# Altium PCB LM2596MOD.PcbDoc
Units mm, origin at the board's own origin, x right, y up, seen from the top; angles counter-clockwise.
Board outline 45.85 x 27.3 mm, 2 copper layers (Top Layer, Bottom Layer); 10 components, 5 nets, 45 pads, 141 vias.
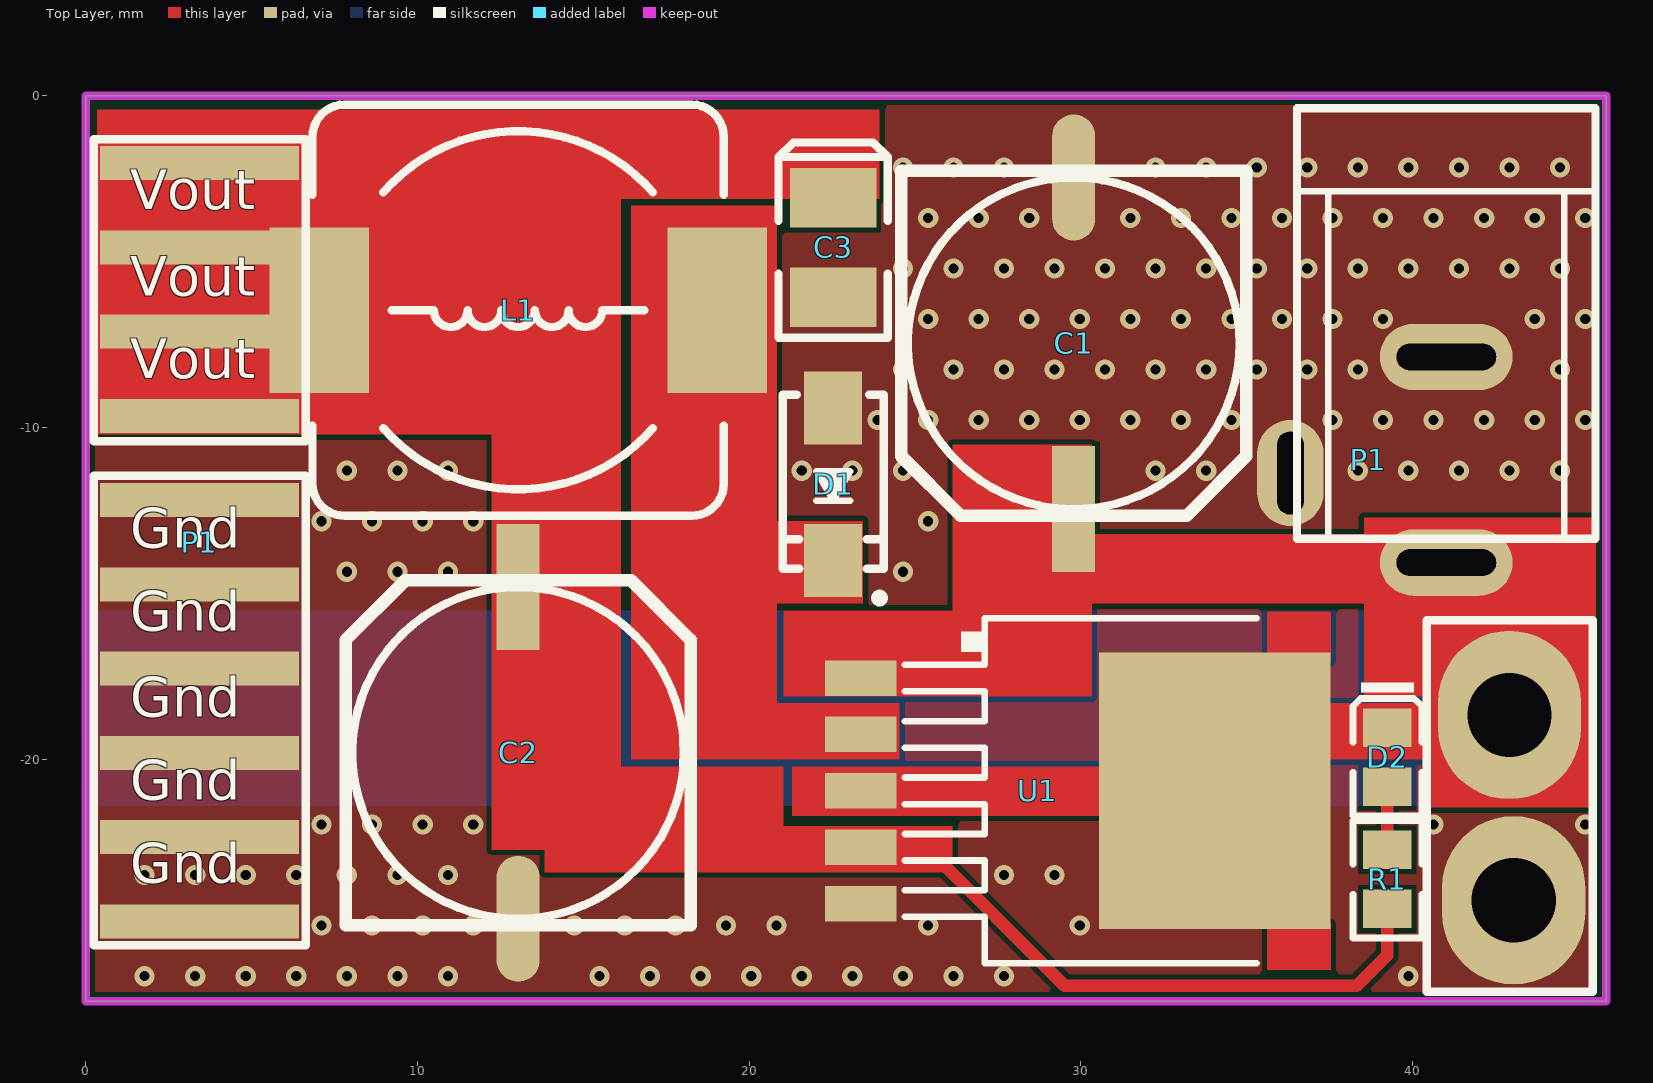
[diagram p0: Top Layer view]
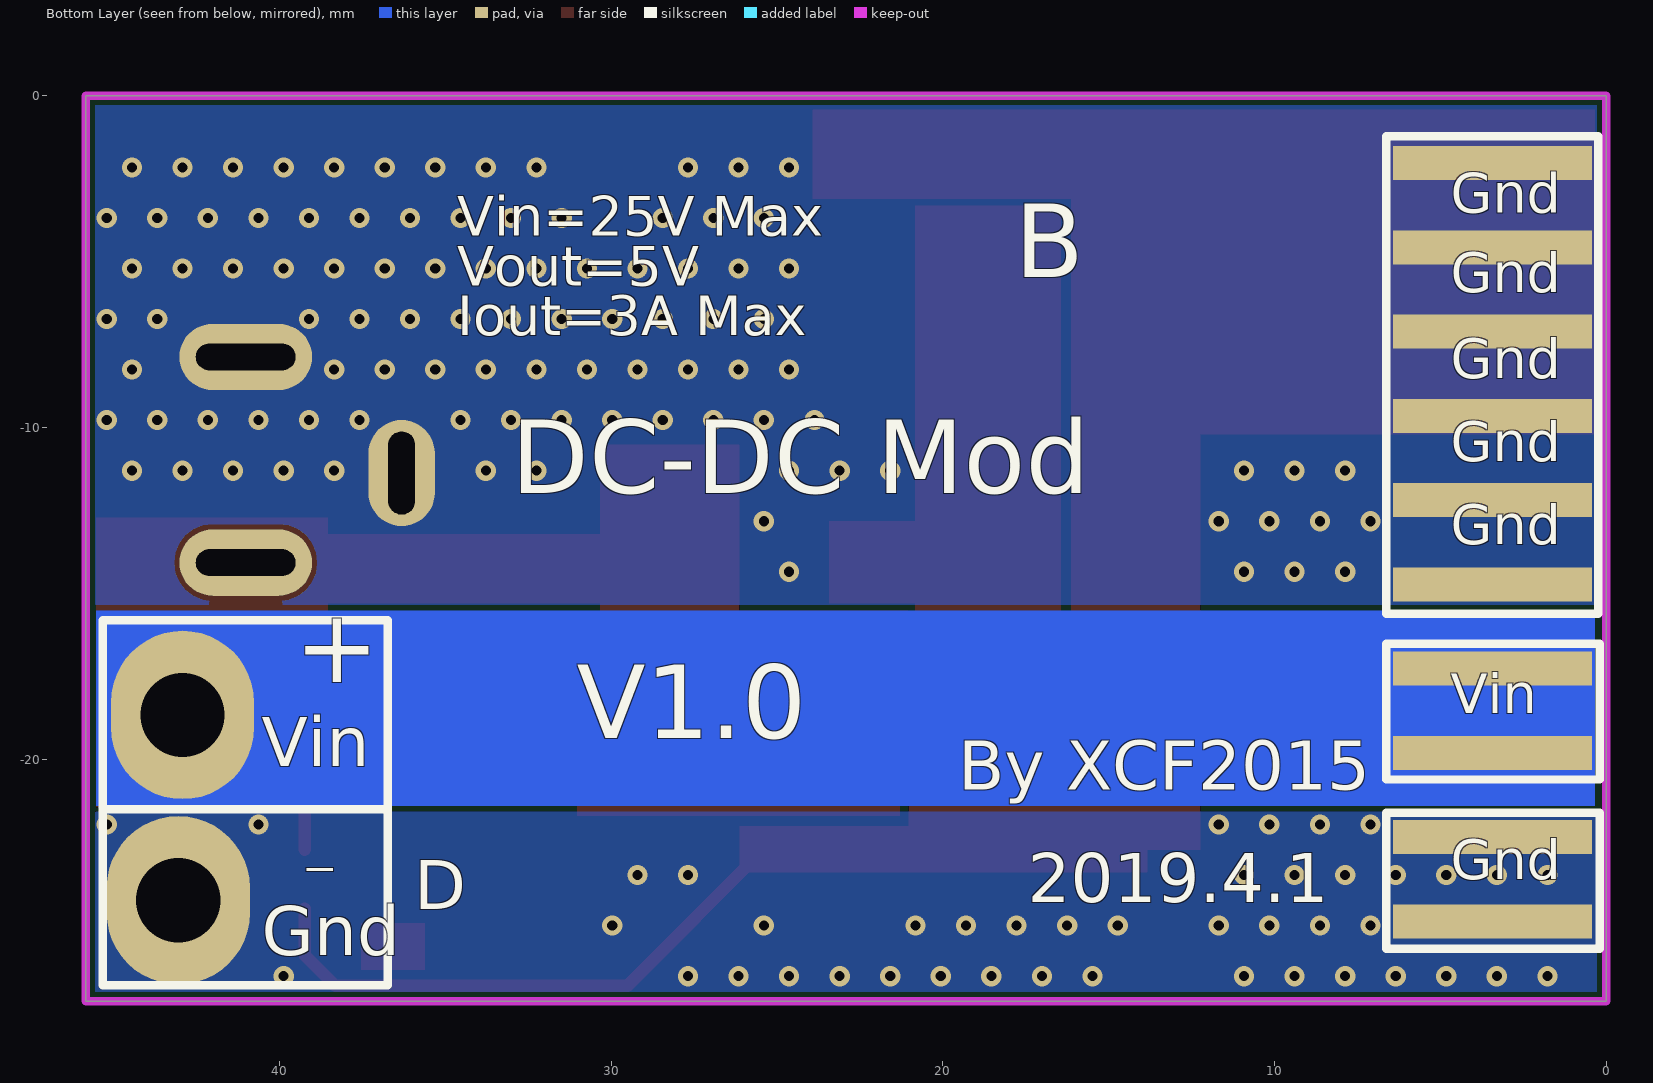
[diagram p1: Bottom Layer view, seen from below]
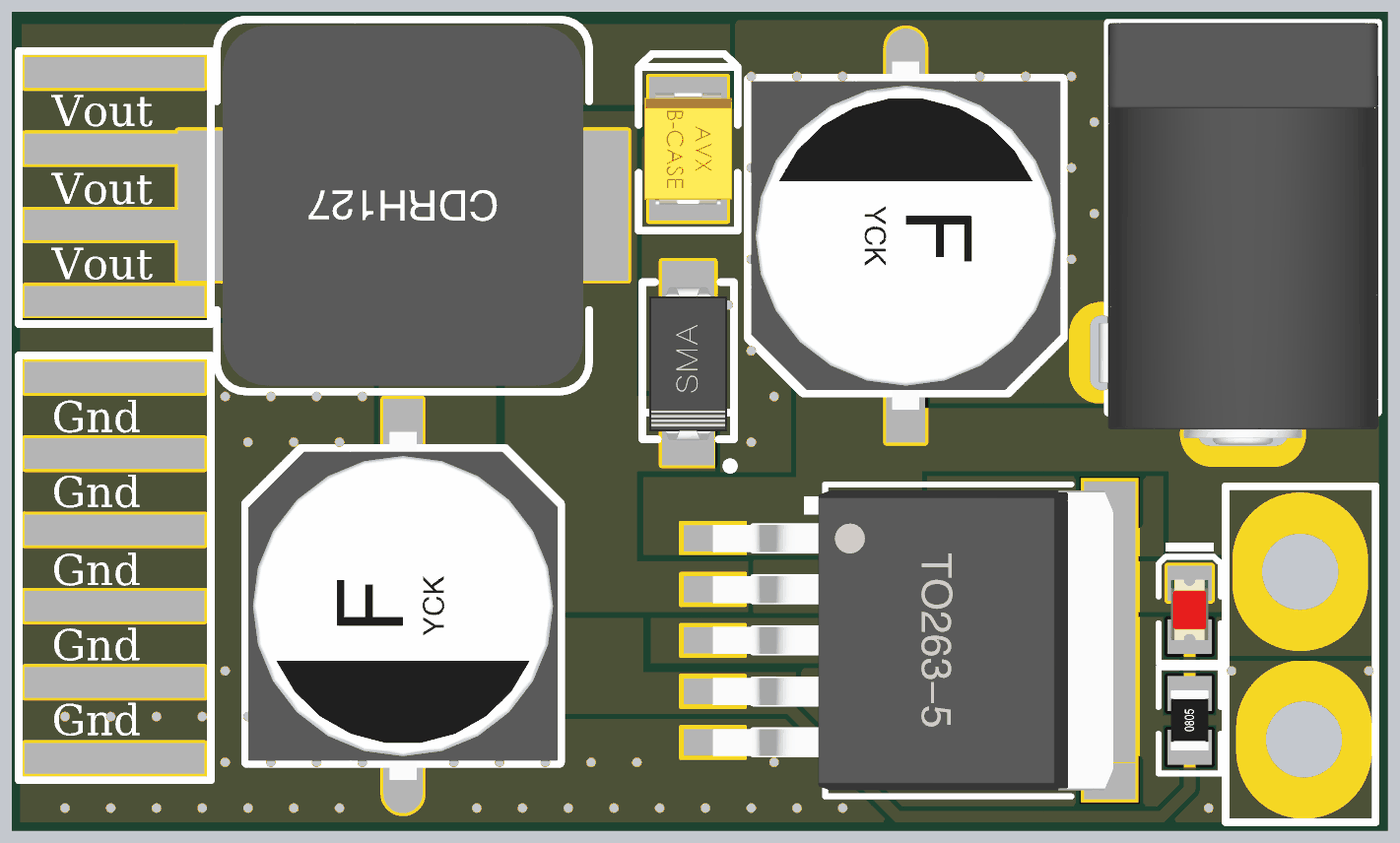
[diagram p2: 3D render of the assembled board from above, using the file's embedded part models]

## Layer stack, top to bottom
Top Solder: solder mask 0.0102, Solder Resist, Dk 3.5
Top Layer: signal copper 0.0356
Dielectric 1: dielectric 0.32, FR-4, Dk 4.8
Bottom Layer: signal copper 0.0356
Bottom Solder: solder mask 0.0102, Solder Resist, Dk 3.5

## Board outline
0,-27.305 0,0 45.847,0 45.847,-27.305

## Design rules (kind name [scope] priority, off if disabled: settings)
Clearance [All] p1: gap=0.152 ignorepadtopadclearanceinfootprint=FALSE
HoleSize [All] p1: absolutevalues=TRUE maxlimit=254 minlimit=0.305 maxpercent=80.000 minpercent=20.000
MinimumSolderMaskSliver [All] p1: minsoldermaskwidth=0
PolygonConnect [All] p1: connectstyle=Direct reliefconductorwidth=0.254 reliefentries=4 polygonreliefangle="90 Angle" airgapwidth=0.254
RoutingVias [All] p1: holewidth=0.305 width=0.61 viastyle="Through Hole" minholewidth=0.305 minwidth=0.61 maxholewidth=0.711 maxwidth=1.27
SilkToSilkClearance [All] p1: silktosilkclearance=0
SilkToSolderMaskClearance [IsPad] p1: minsilkscreentomaskgap=0 clearancetoexposedcopper=TRUE
SolderMaskExpansion [All] p1: expansion=0.102
Width [All] p1: maxlimit=25.4 minlimit=0.152 preferedwidth=0.254
26 further rules are at their usual default settings.

## Components (designator, comment, footprint, x,y, rotation, side; value= is the part's Value field where it differs from the comment)
C1 "220u" "CM F(10*10.2)" 29.788,-7.465 r270 top
C2 "220u" "CM F(10*10.2)" 13.038,-19.812 r90 top
C3 "100uF (107) ±10% 6.3V" CASE-B_3528 22.538,-4.572 r90 top
D1 "SS58" SMA 22.538,-11.715 r270 top
D2 "翠绿 0805" 0805_LED_S1 39.243,-19.94 r270 top
L1 "L" CDRH127 13.038,-6.465 r180 top
P1 "Header 2X10" "TB2.54 10x2" 3.429,-2.032 r0 top
P1 "Power" DC-005 41.021,-7.874 r90 top
R1 "10KΩ" 0805_R 39.243,-23.622 r90 top
U1 "LM2596" TO263 28.702,-20.955 r180 top value=Value

## Footprints (in the part's own frame and the unit in brackets; to place one, negate y for a bottom-side part, rotate by r counter-clockwise, add the part's x,y. Pads: shape width x height; smd on the part's side, far side on the other; paste and mask are expansions set on the pad)
0805_LED_S1 [mm]
  rect 1.16x1.47 smd: A(0.89,0) K(-0.89,0)
  silkscreen extent -2.25,-1.04 1.77,1.03, body extent -1.01,-0.62 1.01,0.62, height 1.1
0805_R [mm]
  rect 1.16x1.47 smd: 1(-0.89,0) 2(0.89,0)
  silkscreen extent -1.77,-1.04 1.77,1.03, body extent -1,-0.62 1,0.63, height 0.49
CASE-B_3528 [mm]
  rect 1.8x2.6 smd: 1(1.5,0) 2(-1.5,0)
  silkscreen extent -2.73,-1.65 3.16,1.65, body extent -1.85,-1.47 1.85,1.46, height 2.03
CDRH127 [mm] "12*12*8mm（长宽高）"
  rect 3x5 smd: 1(-6,0) 2(6,0)
  silkscreen extent -6.2,-6.2 6.2,6.2, body extent -6,-6 6,6, height 7.8
"CM F(10*10.2)" [mm] "贴片电解电容，直径10mm，高10.2mm"
  rect 3.8x1.3 smd: 1(5,0)
  oval 3.8x1.3 smd: 2(-5,0)
  silkscreen extent -5.2,-5.2 5.2,5.2, body extent -5.8,-5.15 5.8,5.15, height 10.2
DC-005 [mm] "5.5*2.1mm，DC30V,2.5A"
  oval 2x4 hole 0.8 slot 3 at 90 deg: 1(-6.2,0) 2(0,0)
  oval 3.2x2 hole 0.8 slot 2.5 at 0 deg: 2(-3.5,4.7)
  silkscreen extent -5.48,-4.5 7.5,4.5, body extent -6.55,-4.5 7.5,4.8, height 11.2
SMA [mm] "4.5x2.6*2.2mm（长宽高，不包括引脚）"
  rect 2.2x1.75 smd: 1(-2.3,0) 2(2.3,0)
  silkscreen extent -2.7,-1.52 3.56,1.52, body extent -2.53,-1.3 2.58,1.3, height 2.15
"TB2.54 10x2" [mm]
  rect 6x1.02 smd: 1(0,0) 3(0,-2.54) 5(0,-5.08) 7(0,-7.62) 9(0,-10.16) 11(0,-12.7) 13(0,-15.24) 15(0,-17.78) 17(0,-20.32) 19(0,-22.86)
  rect 6x1.02 smd far side: 2(0,0) 4(0,-2.54) 6(0,-5.08) 8(0,-7.62) 10(0,-10.16) 12(0,-12.7) 14(0,-15.24) 16(0,-17.78) 18(0,-20.32) 20(0,-22.86)
TO263 [mm]
  rect 2.16x1.07 smd paste-0.102 mask+0.051: 1(5.338,-3.4) 2(5.338,-1.7) 3(5.338,0.005) 4(5.338,1.7) 5(5.338,3.4)
  rect 6.99x8.33 smd paste-0.102 mask+0.051: 6(-5.338,0)
  Top Layer region: -8.833,-3.9 -8.832,-5.4 -6.923,-5.4 -6.923,-3.9
  Top Layer region: -8.833,5.4 -8.832,4 -6.923,4 -6.923,5.4
  silkscreen extent -6.6,-5.2 4,5.2, body extent -7.99,-5 5.34,5.01, height 4.5

## Part data
C1 C2: library part Cp, "Polarized Capacitor (Axial)", LatestRevisionDate=17-Jul-2002, LatestRevisionNote="Re-released for DXP Platform.", PackageDescription="Polarized Capacitor; 2 Leads", PackageReference=POLAR0.8, Published=8-Jun-2000, Publisher="Altium Limited"
C3: library part "3528 100uF (107) 10% 6.3V", "钽电容", Package=3528, SuppliersPartNumber=C16133, ComponentLink1Description=供应, ComponentLink1URL=http://www.szlcsc.com/product/details_16815.html, Supplier=LC
D1: library part Dz, "整流二极管", BOM名称=Õ, 学习资源=www.oooc
D2: library part "0805 翠绿", "发光二极管", Package=0805, SuppliersPartNumber=C2297, ComponentLink1Description=供应, ComponentLink1URL=http://www.szlcsc.com/product/details_2670.html, Supplier=LC
P1: library part "Header 10X2", "10*2P接插件", BOM名称=10*2P, 学习资源=www.oooc
R1: library part "0805 10KΩ (1002) 1%", "贴片电阻", Package=0805, SuppliersPartNumber=C17414, ComponentLink1Description=供应, ComponentLink1URL=http://www.szlcsc.com/product/details_18102.html, Supplier=LC
U1: "Imported", Alternate_PartNumber=LM2596S-ADJ/NOPB, Manufacturer="Texas Instruments", PartNumber=LM2596SX-ADJ/NOPB, CompType=IC, MountType=SMT, PackageReference=KTT0005B, PIN_COUNT=6, RefDes=RefDes, RoHS=Y, Type=TYPE

## Free pads (board coordinates)
  oval 4.318x5.08 hole 2.54: 11(42.926,-18.669) 12(43.053,-24.257)

## Via types
v1: diameter 0.61, hole 0.305, Top Layer to Bottom Layer, tented both sides, 141 vias

## Nets (pads, with @x,y where several pads share a name; then routed paths per layer and width w, separated by ;. In a path a pad name is that pad's centre, name@x,y a point inside that pad or via, vN(x,y) a via of type N, cw(c..) or ccw(c..) an arc to the next point about the centre after c; other vN are vias at no path point)
GND: C1.2 C2.2 C3.2 D1.1 D2.K P1.2 P1.4 P1.6 P1.8 P1.9 P1.10 P1.11 P1.12 P1.13 P1.15 P1.17 P1.18 P1.19 P1.20 pad.12 U1.3 U1.5 U1.6
  other v1: 1.778,-26.543 3.302,-26.543 4.826,-26.543 6.35,-26.543 7.874,-26.543 9.398,-26.543 10.922,-26.543 15.494,-26.543 17.018,-26.543 18.542,-26.543 20.066,-26.543 21.59,-26.543 23.114,-26.543 24.638,-26.543 26.162,-26.543 27.686,-26.543 39.878,-26.543 7.112,-25.019 8.636,-25.019 10.16,-25.019 11.684,-25.019 14.732,-25.019 16.256,-25.019 17.78,-25.019 19.304,-25.019 20.828,-25.019 25.4,-25.019 29.972,-25.019 1.778,-23.495 3.302,-23.495 4.826,-23.495 6.35,-23.495 7.874,-23.495 9.398,-23.495 10.922,-23.495 27.686,-23.495 29.21,-23.495 7.112,-21.971 8.636,-21.971 10.16,-21.971 11.684,-21.971 40.64,-21.971 45.212,-21.971 7.874,-14.351 9.398,-14.351 10.922,-14.351 24.638,-14.351 7.112,-12.827 8.636,-12.827 10.16,-12.827 11.684,-12.827 25.4,-12.827 7.874,-11.303 9.398,-11.303 10.922,-11.303 21.59,-11.303 23.114,-11.303 24.638,-11.303 32.258,-11.303 33.782,-11.303 38.354,-11.303 39.878,-11.303 41.402,-11.303 42.926,-11.303 44.45,-11.303 23.876,-9.779 25.4,-9.779 26.924,-9.779 28.448,-9.779 29.972,-9.779 31.496,-9.779 33.02,-9.779 34.544,-9.779 37.592,-9.779 39.116,-9.779 40.64,-9.779 42.164,-9.779 43.688,-9.779 45.212,-9.779 24.638,-8.255 26.162,-8.255 27.686,-8.255 29.21,-8.255 30.734,-8.255 32.258,-8.255 33.782,-8.255 35.306,-8.255 36.83,-8.255 38.354,-8.255 44.45,-8.255 25.4,-6.731 26.924,-6.731 28.448,-6.731 29.972,-6.731 31.496,-6.731 33.02,-6.731 34.544,-6.731 36.068,-6.731 37.592,-6.731 39.116,-6.731 43.688,-6.731 45.212,-6.731 24.638,-5.207 26.162,-5.207 27.686,-5.207 29.21,-5.207 30.734,-5.207 32.258,-5.207 33.782,-5.207 35.306,-5.207 36.83,-5.207 38.354,-5.207 39.878,-5.207 41.402,-5.207 42.926,-5.207 44.45,-5.207 25.4,-3.683 26.924,-3.683 28.448,-3.683 31.496,-3.683 33.02,-3.683 34.544,-3.683 36.068,-3.683 37.592,-3.683 39.116,-3.683 40.64,-3.683 42.164,-3.683 43.688,-3.683 45.212,-3.683 24.638,-2.159 26.162,-2.159 27.686,-2.159 32.258,-2.159 33.782,-2.159 35.306,-2.159 36.83,-2.159 38.354,-2.159 39.878,-2.159 41.402,-2.159 42.926,-2.159 44.45,-2.159
NetD1_2: D1.2 L1.1 U1.2
NetD2_A: D2.A R1.2 | length 1.9
  Top Layer w0.381: R1.2 D2.A
Vin: C1.1 P1.1@41.021,-14.074 P1.14 P1.16 pad.11 U1.1
Vout: C2.1 C3.1 L1.2 P1.1@3.429,-2.032 P1.3 P1.5 P1.7 R1.1 U1.4 | length 17.4
  Top Layer w0.381: 25.338,-22.655 29.518,-26.835 38.318,-26.835 39.243,-25.91 R1.1

## Polygon pours and split planes (outlines as drawn)
GND on Top Layer "GND_L01_P002" (solid, pour order 2): 0,-27.305 0,0 45.847,0 45.847,-27.305
GND on Bottom Layer "GND_L02_P004" (solid, pour order 4): 0,-27.305 0,0 45.847,0 45.847,-27.305

## Keep-outs
Keep-Out Layer:
  the board outline again, w0.254

## Other copper
Top Layer:
  rectangle net Vin: 27.838,-15.315 39.038,-13.215
  rectangle net Vin: 26.138,-17.015 30.338,-10.515
  rectangle net Vin: 21.038,-18.115 30.338,-15.515
  rectangle net GND: 34.738,-20.015 40.338,-18.315
  rectangle net Vout: 24.138,-23.415 26.138,-22.015
  rectangle net Vout: 0.338,-3.115 23.938,-0.415
  rectangle net Vout: 0.338,-10.215 16.138,-2.815
  rectangle net Vout: 12.238,-21.315 16.138,-8.415
  rectangle net Vout: 12.238,-22.732 21.038,-20.215
  rectangle net Vout: 13.838,-23.415 24.538,-22.015
  rectangle net NetD1_2: 19.138,-15.315 23.438,-12.815
  rectangle net NetD1_2: 16.438,-20.015 20.838,-3.315
  rectangle net NetD1_2: 17.438,-20.015 24.538,-18.315
  rectangle net GND: 21.288,-21.715 31.038,-20.215
  rectangle net Vin: 40.538,-21.465 45.538,-15.555
  rectangle net Vin: 38.538,-18.115 45.538,-12.715
Bottom Layer:
  rectangle net Vin: 0.338,-21.415 45.538,-15.515

## Silkscreen, mask and mechanical layers (free items; w line width, h text height)
Top Overlay:
  lines w0.254: 0.238,-25.615 0.238,-11.461 6.638,-11.461 6.638,-25.615 0.238,-25.615 ; 0.238,-10.415 6.638,-10.415 6.638,-1.315 0.238,-1.315 0.238,-10.415 ; 40.438,-27.015 45.438,-27.015 45.438,-15.815 40.438,-15.815 40.438,-27.015
  text "Vout" at 1.338,-3.815 h2.03
  text "Vout" at 1.338,-6.415 h2.03
  text "Vout" at 1.338,-8.915 h2.03
  text "Gnd" at 1.338,-14.015 h2.03
  text "Gnd" at 1.338,-16.515 h2.03
  text "Gnd" at 1.338,-19.115 h2.03
  text "Gnd" at 1.338,-21.615 h2.03
  text "Gnd" at 1.338,-24.115 h2.03
Bottom Overlay:
  lines w0.254: 36.738,-21.515 45.338,-21.515 ; 0.202,-25.715 6.638,-25.715 6.638,-21.615 0.202,-21.615 0.202,-25.715 ; 0.202,-20.615 0.202,-16.515 6.638,-16.515 6.638,-20.615 0.202,-20.615 ; 0.238,-15.615 0.238,-1.215 6.638,-1.215 6.638,-15.615 0.238,-15.615 ; 36.738,-26.815 45.338,-26.815 45.338,-15.815 36.738,-15.815 36.738,-26.815
  text "Gnd" at 4.694,-3.915 h2.03
  text "Vin=25V Max" at 34.638,-4.615 h2.03
  text "Vout=5V" at 34.638,-6.115 h2.03
  text "B" at 17.838,-6.215 h3.81
  text "Gnd" at 4.694,-6.315 h2.03
  text "Iout=3A Max" at 34.638,-7.615 h2.03
  text "Gnd" at 4.694,-8.915 h2.03
  text "Gnd" at 4.694,-11.415 h2.03
  text "DC-DC Mod" at 33.02,-12.715 h3.81
  text "Gnd" at 4.694,-13.915 h2.03
  text "+" at 39.538,-18.415 h3.81
  text "Vin" at 4.694,-19.015 h2.03
  text "V1.0" at 31.038,-20.115 h3.81
  text "Vin" at 40.538,-20.715 h2.54
  text "By XCF2015" at 19.538,-21.415 h2.54
  text "Gnd" at 4.694,-24.015 h2.03
  text "2019.4.1" at 17.438,-24.815 h2.54
  text "-" at 39.338,-24.815 h3.81
  text "D" at 35.938,-25.019 h2.54
  text "Gnd" at 40.538,-26.415 h2.54